# Altium PCB oldx_fc.PcbDoc (part 1 of 2)
Units mil, origin at the board's own origin, x right, y up, seen from the top; angles counter-clockwise.
Board outline 3255.08 x 2310.05 mil, 4 copper layers (Top Layer, Mid-Layer 1, Mid-Layer 2, Bottom Layer); 154 components, 132 nets, 622 pads, 230 vias.
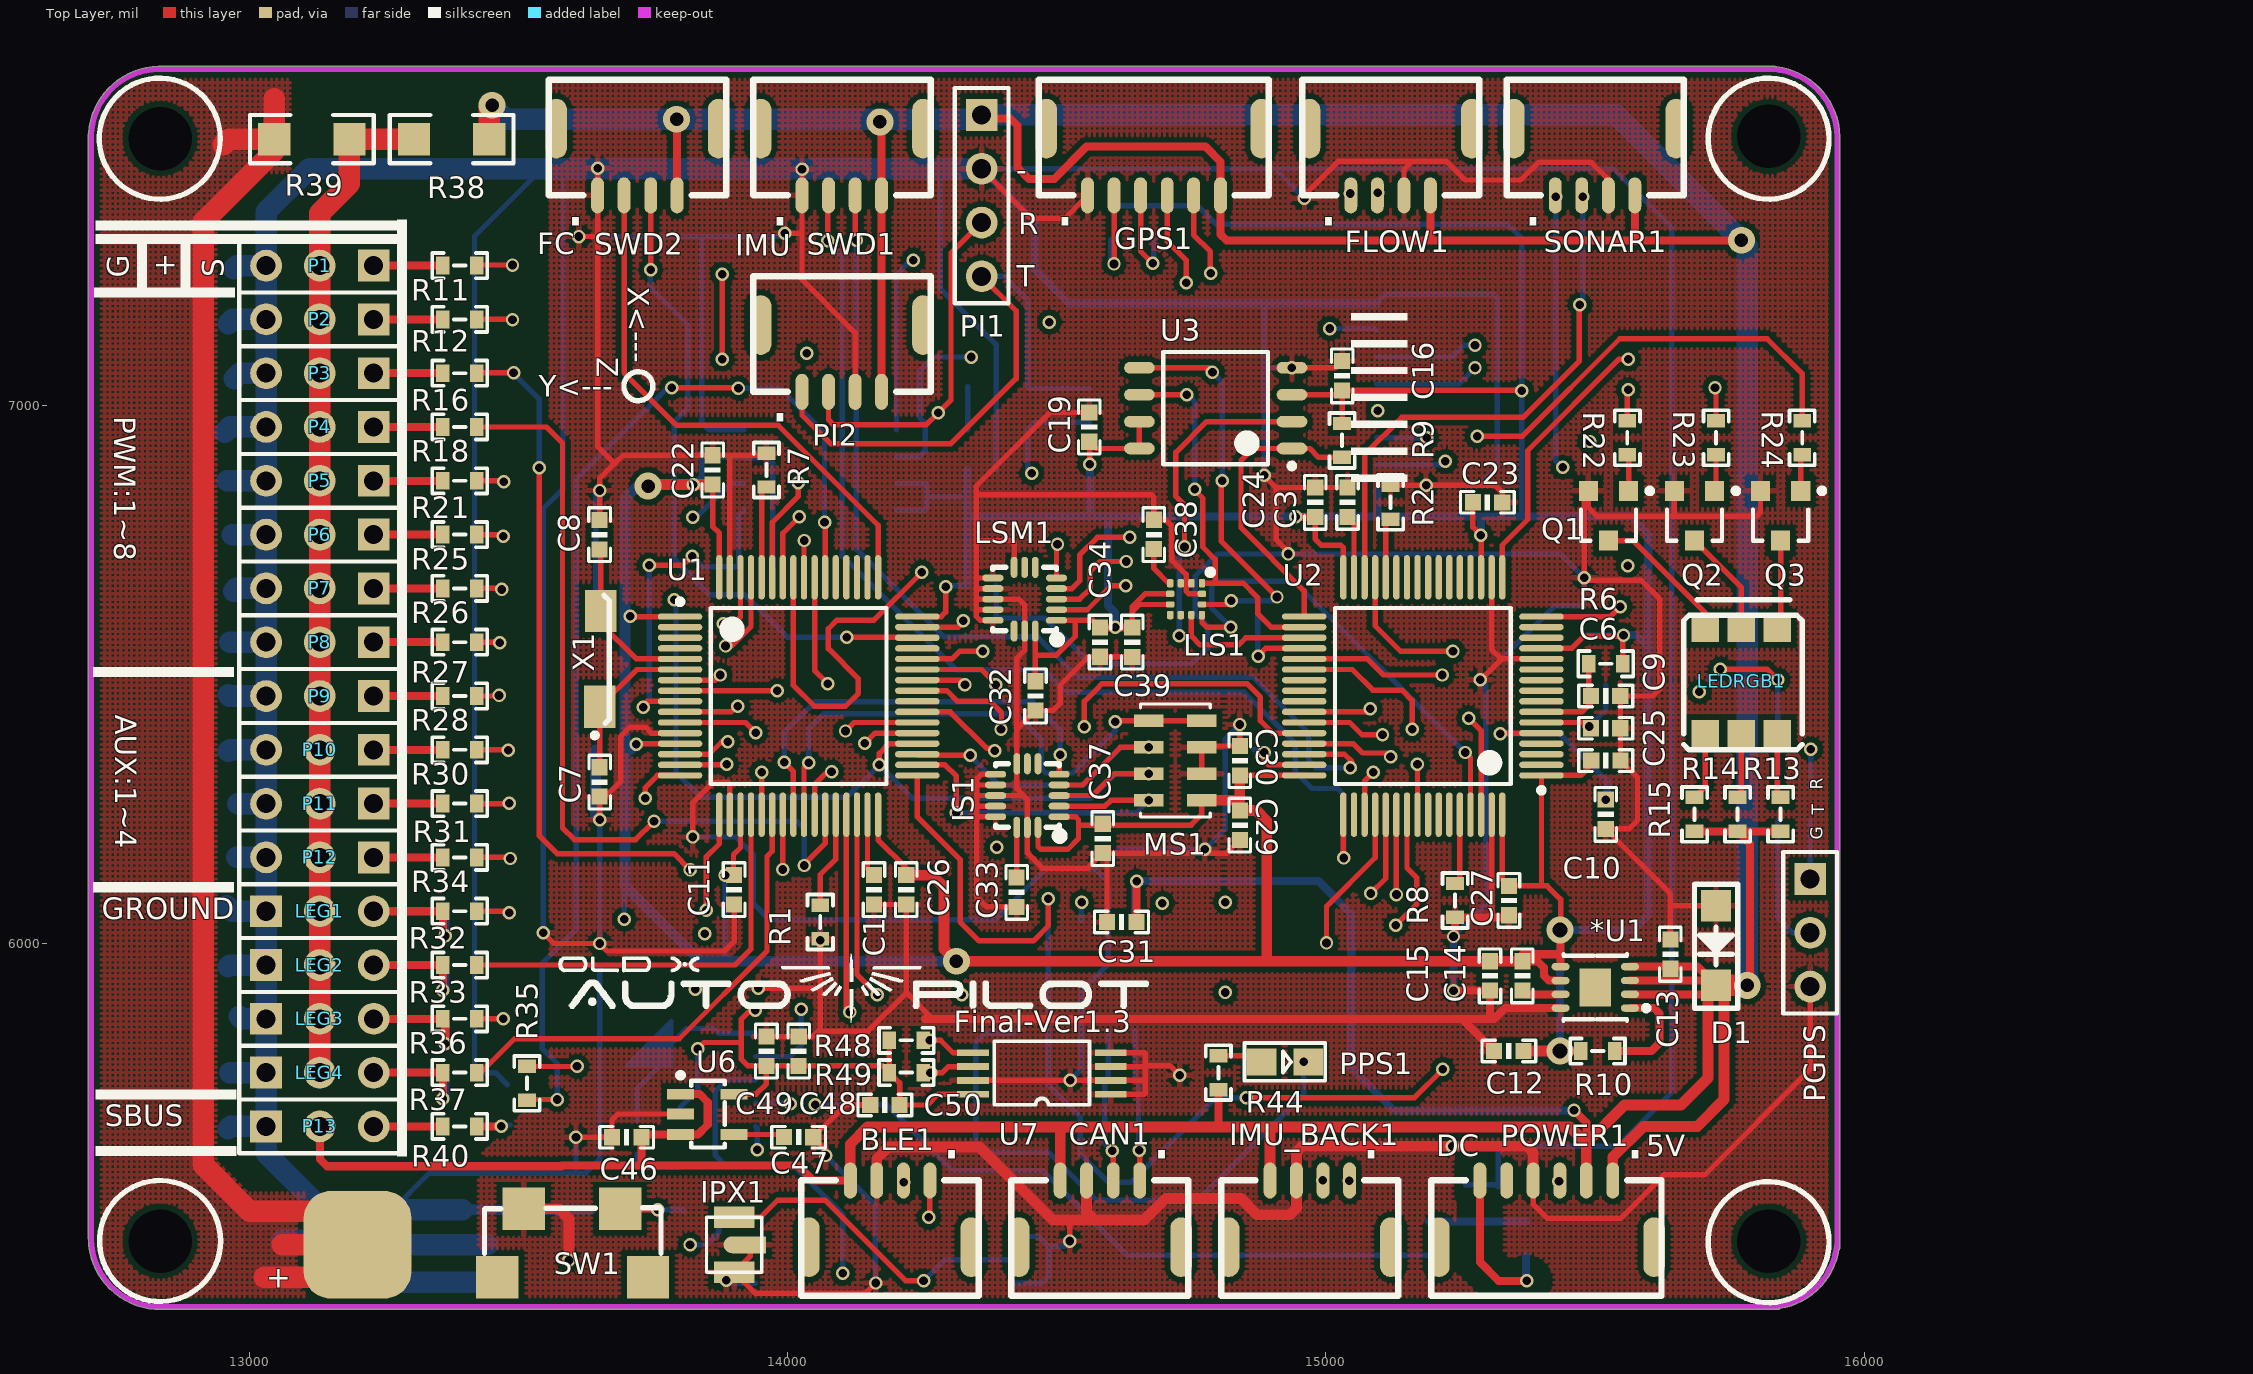
[diagram p0: Top Layer view]
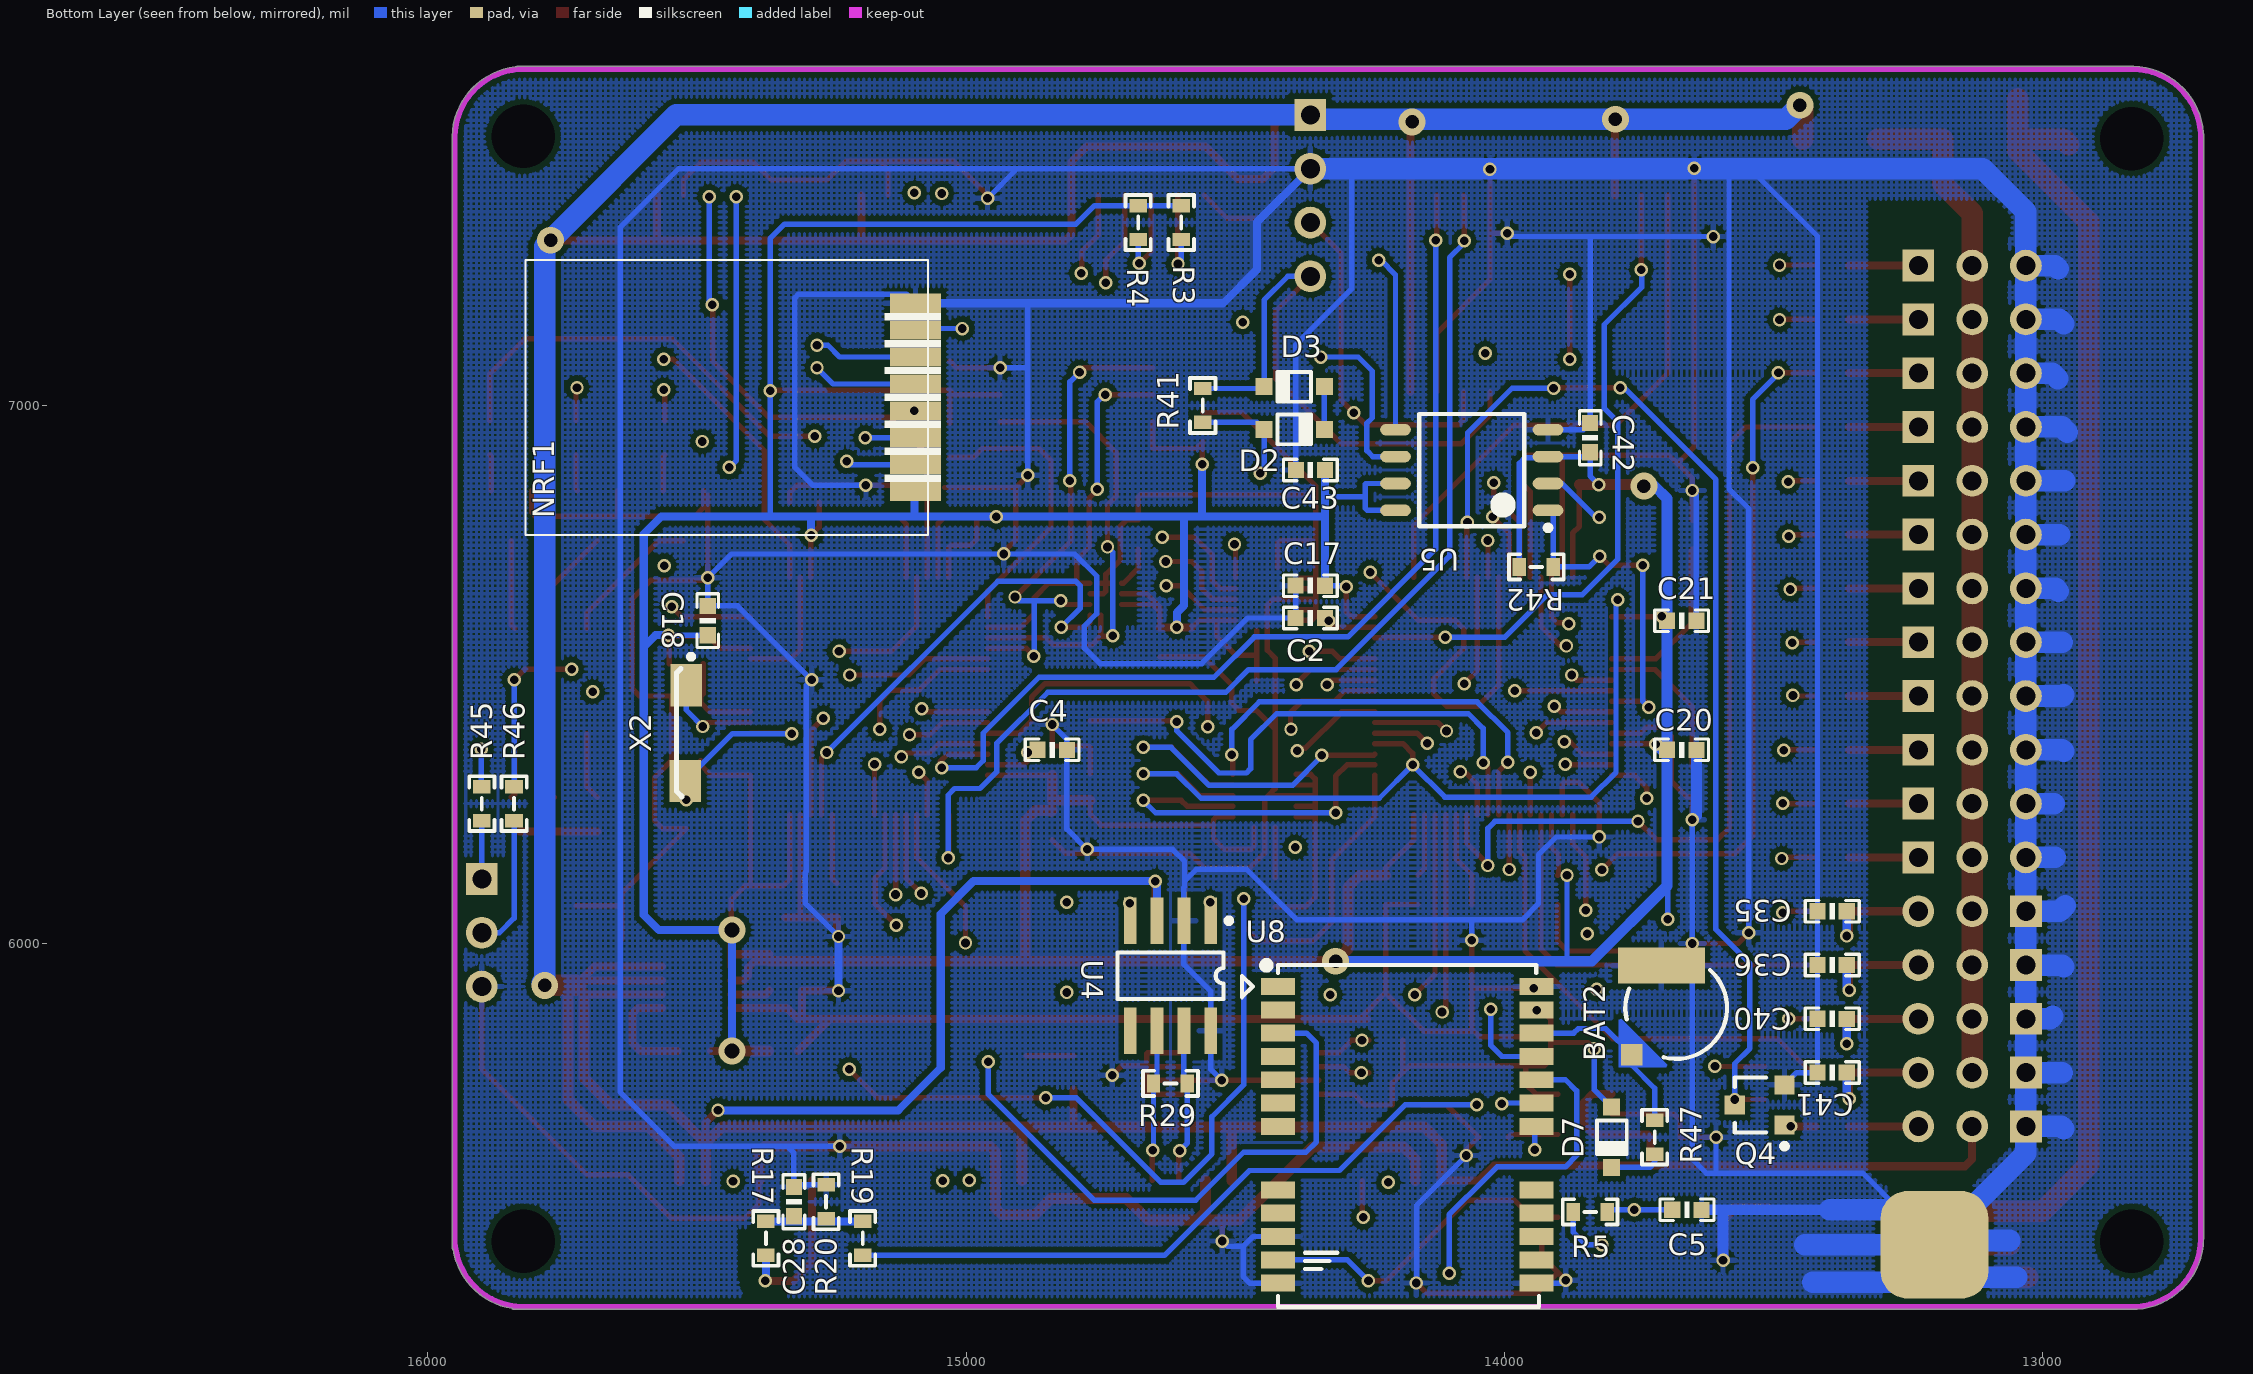
[diagram p1: Bottom Layer view, seen from below]
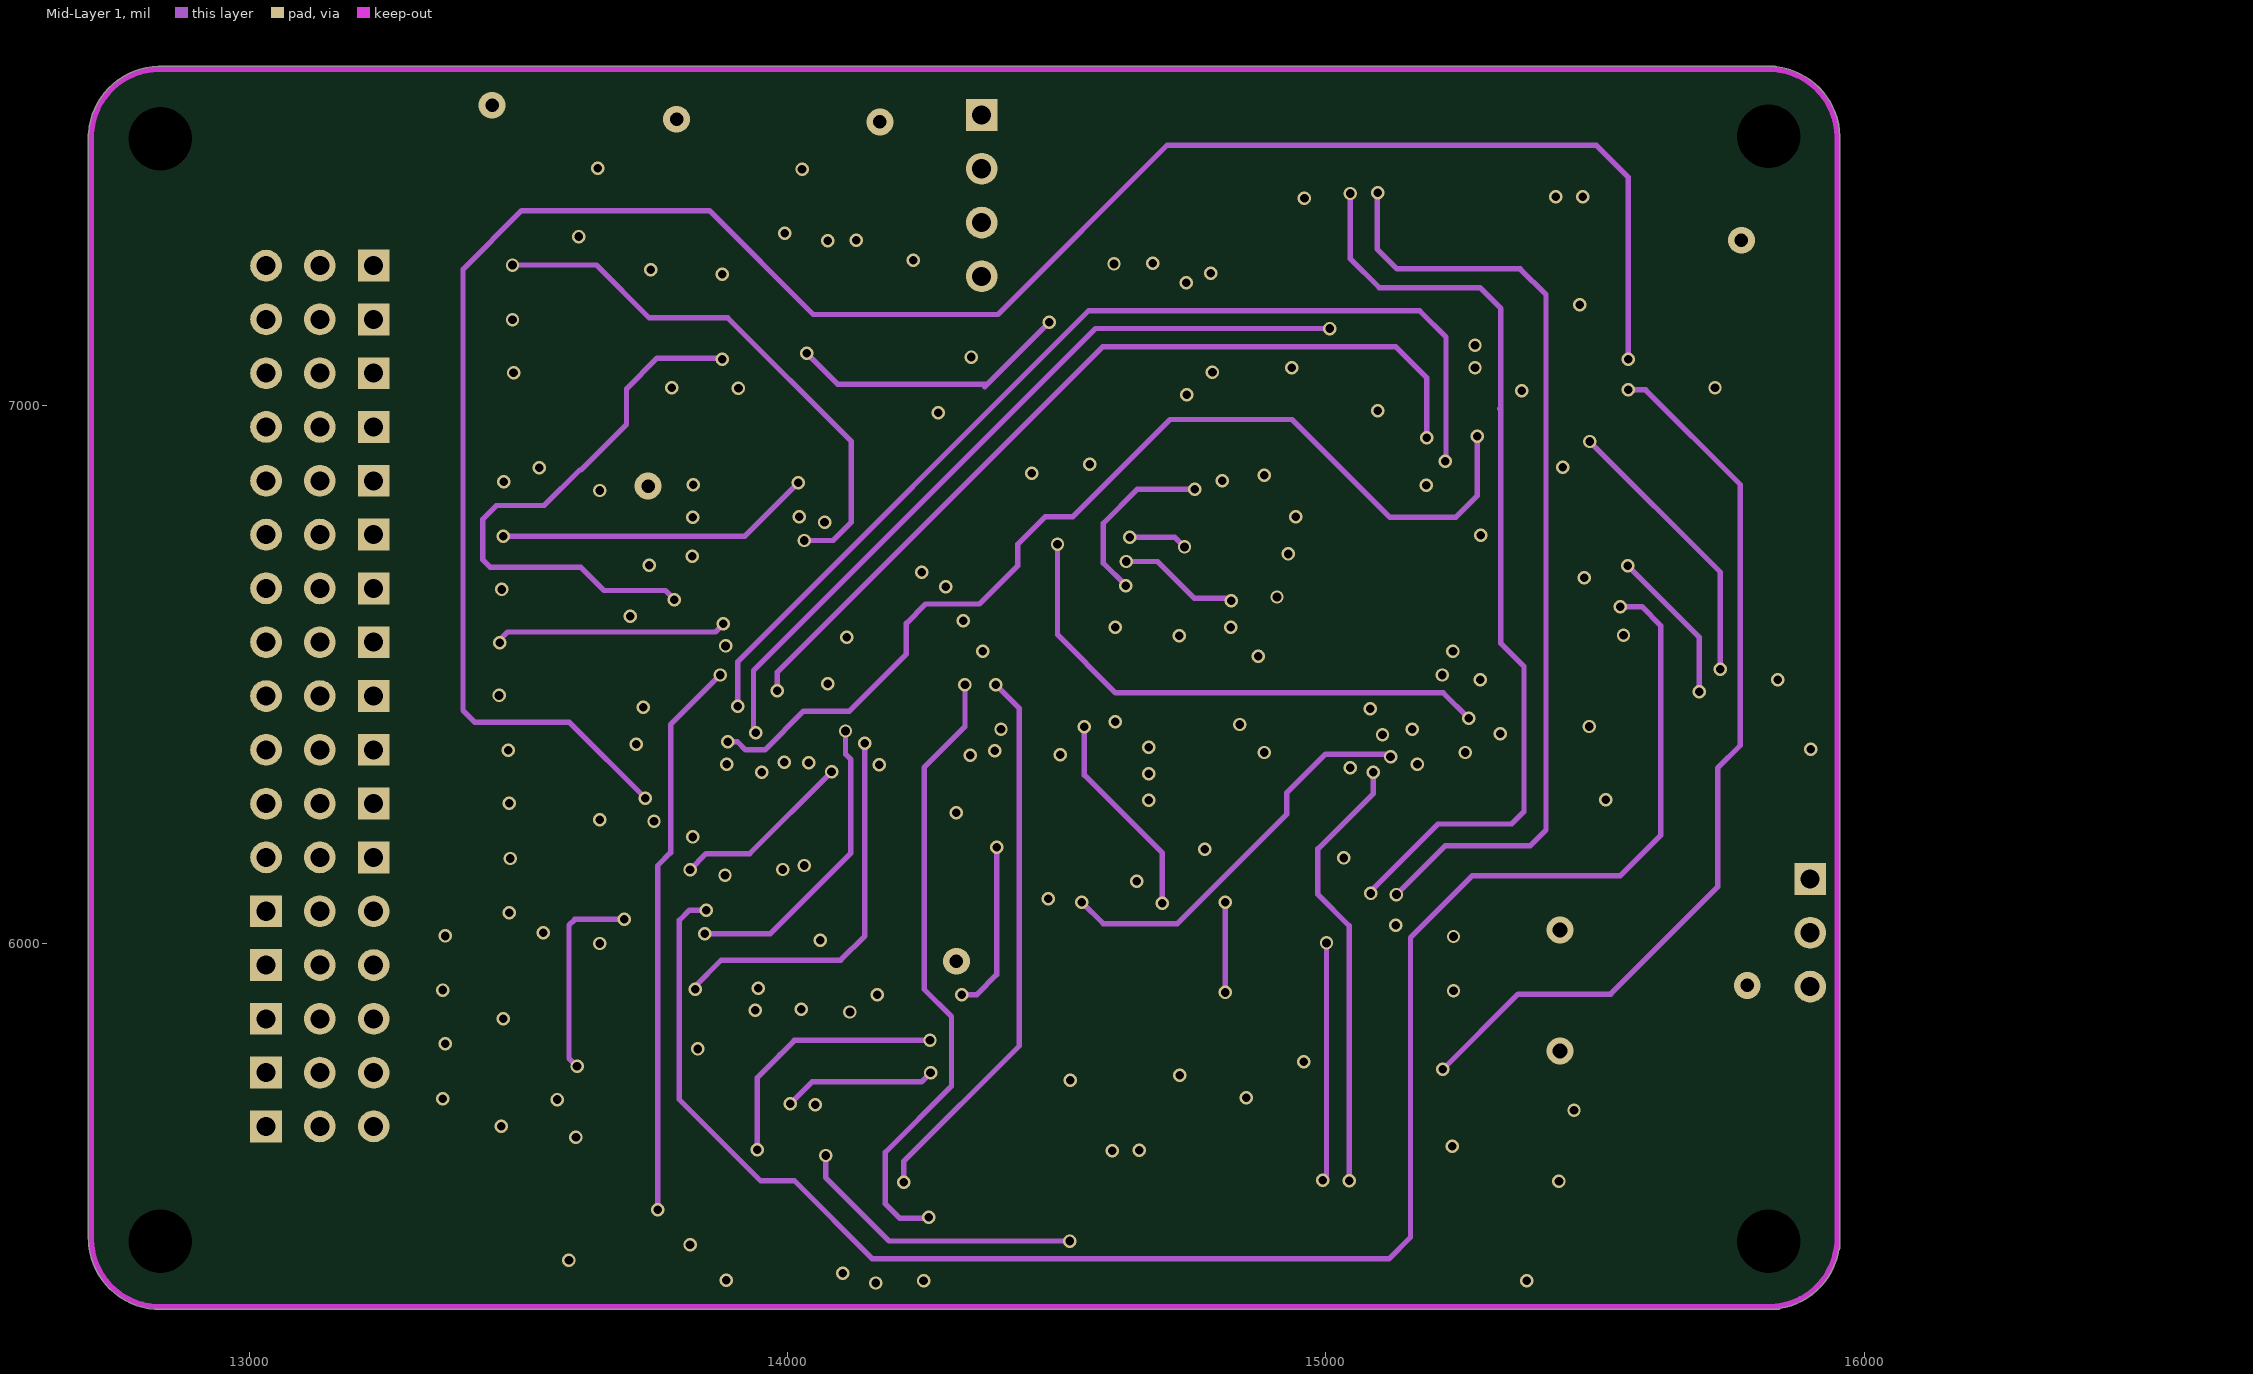
[diagram p2: Mid-Layer 1]
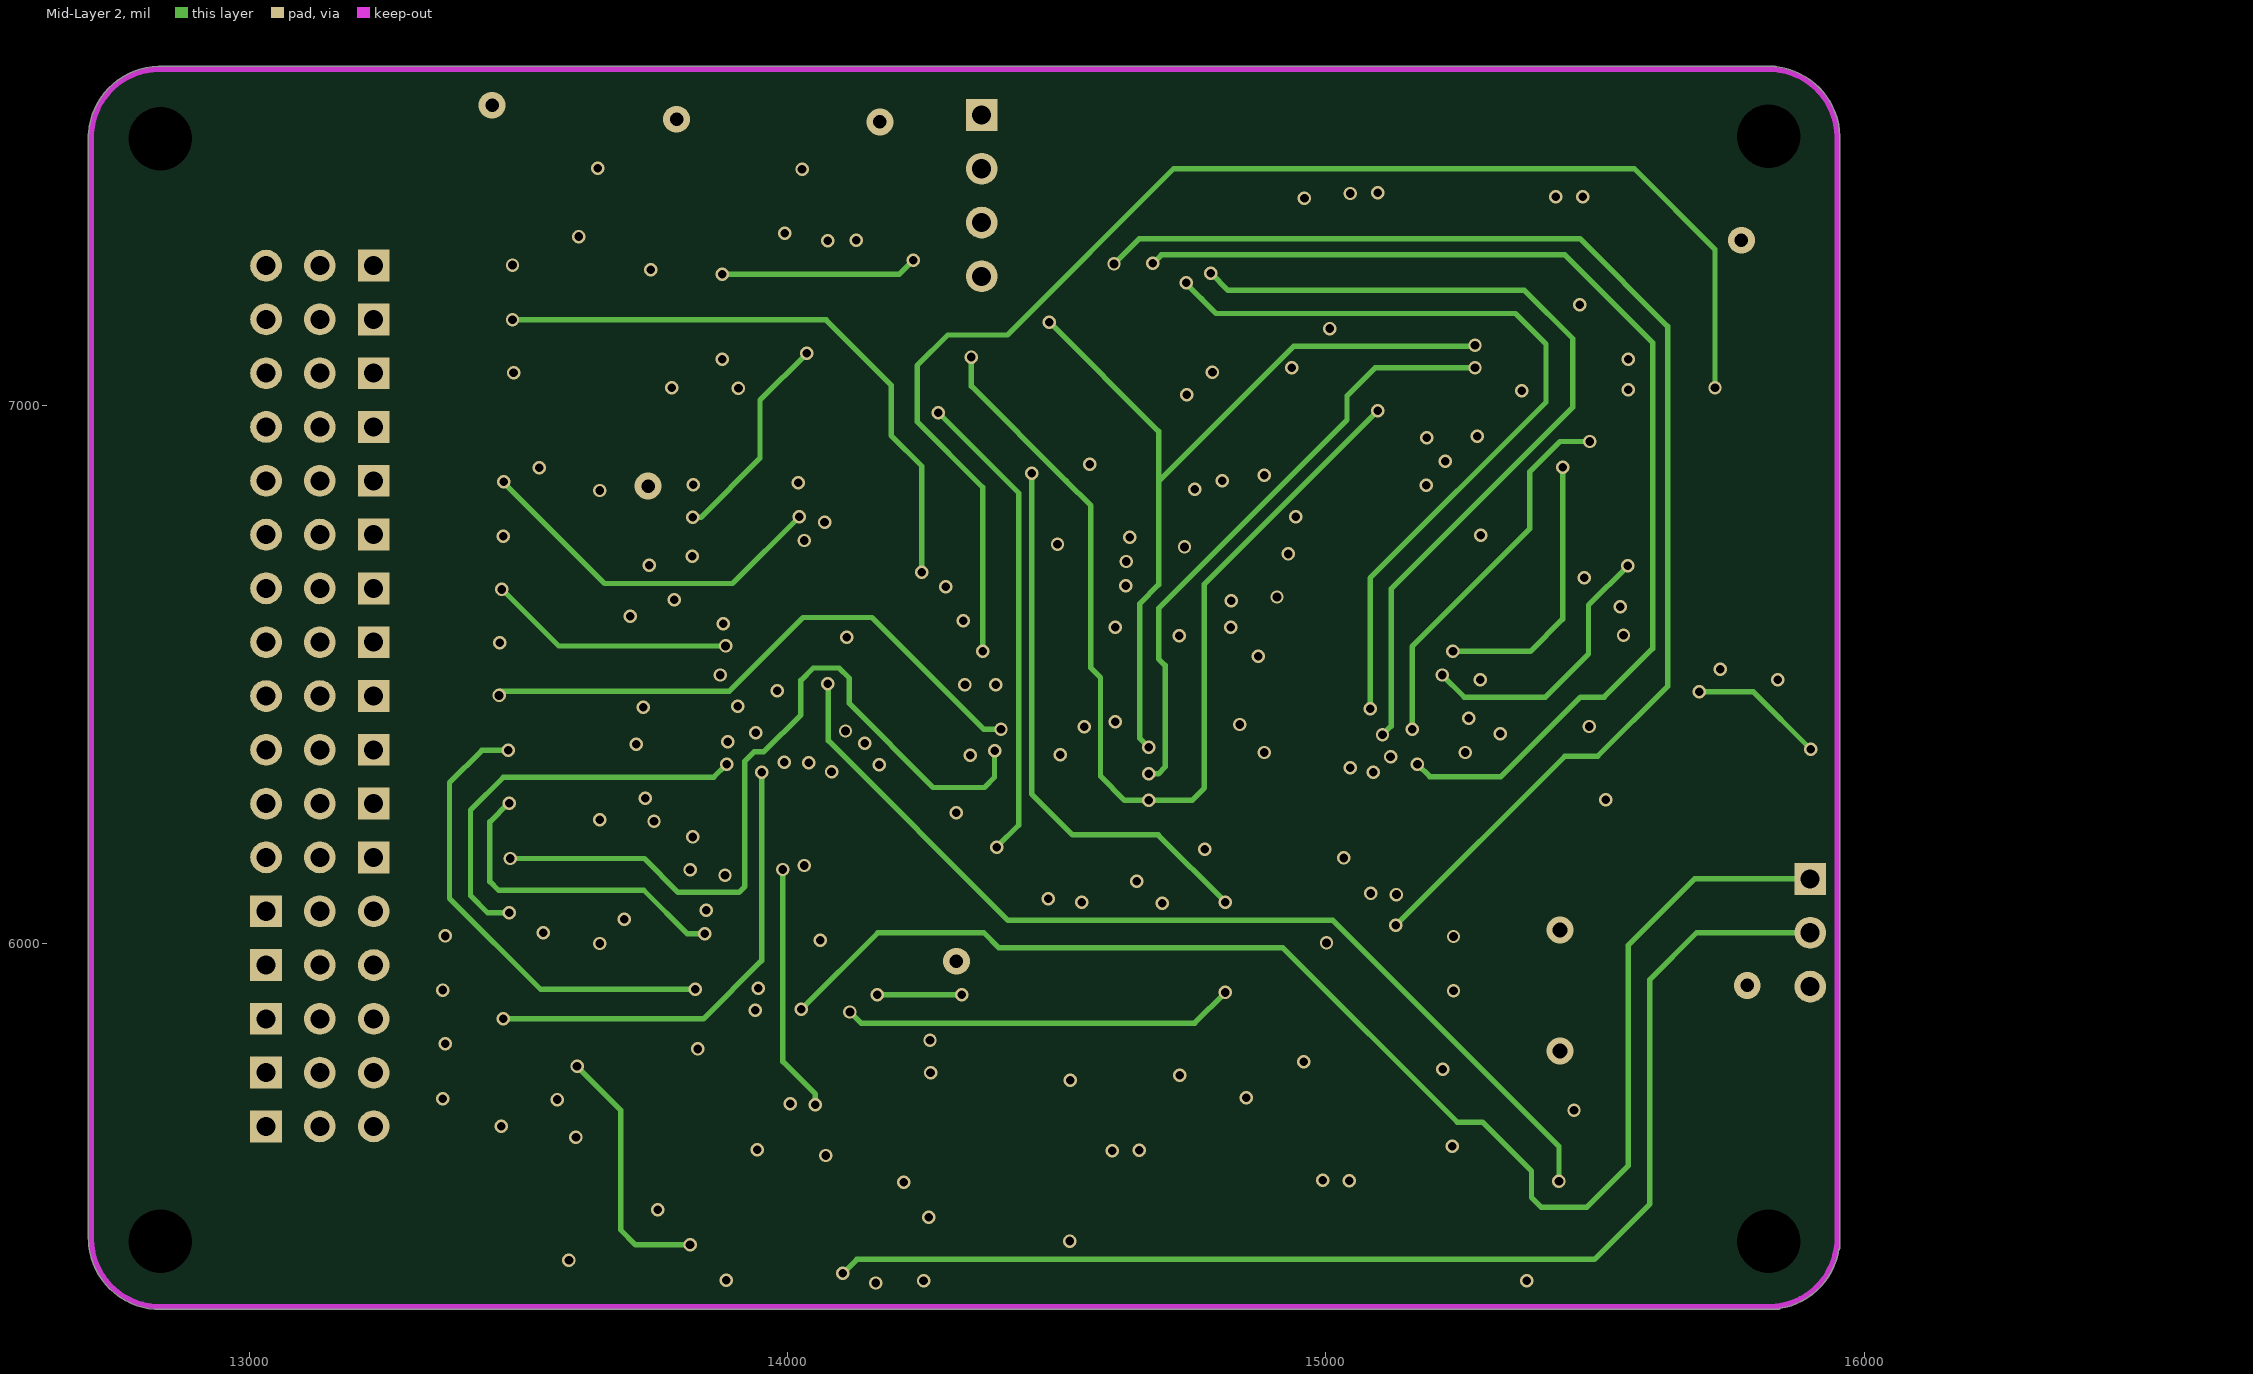
[diagram p3: Mid-Layer 2]

## Layer stack, top to bottom
Top Layer: signal copper 1.4
Dielectric: core 12.6, FR-4, Dk 4.8
Mid-Layer 1: signal copper 1.4
Dielectric: prepreg 12.6, FR-4, Dk 4.8
Mid-Layer 2: signal copper 1.4
Dielectric: core 12.6, FR-4, Dk 4.8
Bottom Layer: signal copper 1.4

## Board outline
12699.99,5449.9 cw(c12705,5450) 12699.99,5450 12699.99,7494.95 cw(c12832.5,7497.5) 12699.99,7500.05 12699.99,7505 cw(c12705,7505) 12700.28,7506.69 cw(c12832.5,7497.5) 12829.9,7630.01 cw(c12830,7625) 12830,7630.02 15819.95,7630.02 cw(c15822.5,7497.5) 15825.05,7630.02 15835,7630.02 cw(c15835,7625) 15837.81,7629.15 cw(c15822.5,7497.5) 15955.01,7500.1 cw(c15950,7500) 15955.01,7500 15955.01,5455.05 ccw(c15822.5,5452.5) 15955.01,5455.1 15955.01,5455.05 cw(c15822.5,5452.5) 15955.04,5452.5 cw(c15822.5,5452.5) 15955.01,5449.95 15955.01,5435 cw(c15950,5435) 15953.32,5431.24 cw(c15822.5,5452.5) 15843.75,5321.68 cw(c15840,5325) 15840,5319.98 12835.05,5319.98 ccw(c12832.5,5452.5) 12835.1,5319.99 12835.05,5319.98 cw(c12832.5,5452.5)

## Design rules (kind name [scope] priority, off if disabled: settings)
Clearance Clearance_2 [(InPolygon) vs InNet('POWER')] p1: gap=35
Clearance Clearance_1 [(InPolygon)] p2: gap=10
Clearance [All] p3: gap=6
PolygonConnect [All] p1: connectstyle=Relief reliefconductorwidth=10 reliefentries=4 polygonreliefangle="90 Angle"
RoutingVias [All] p1: holewidth=28 width=50 viastyle="Through Hole" minholewidth=16 minwidth=25 maxholewidth=28 maxwidth=50
SilkscreenOverComponentPads [All] p1: minsilkscreentomaskgap=10
SolderMaskExpansion [All] p1: expansion=4
Width [All] p1: maxlimit=40 minlimit=10 preferedwidth=10 minimp=50.000000 maximp=50.000000 favimp=50.000000
27 further rules are at their usual default settings.

## Components (designator, comment, footprint, x,y, rotation, side; value= is the part's Value field where it differs from the comment)
*U1 "AS1364-BTDT-33" TDFN-8 15565,5880 r0 top
BAT2 "XH414" XH414 13680,5880 r0 bottom
BLE1 "Header 4" JST_GH_V4 14190,5345 r180 top
C1 "2.2UF" C0603 14160,6100 r270 top
C2 "2.2UF" C0603 14360,6605 r0 bottom
C3 "2.2UF" C0603 15040,6820 r90 top
C4 "2.2UF" C0603 14840,6360 r180 bottom
C5 "10NF" C0603 13660,5505 r0 bottom
C6 "10NF" C0603 15520,6460 r180 top
C7 "20PF" C0603 13650,6300 r90 top
C8 "20PF" C0603 13650,6760 r270 top
C9 "20PF" C0603 15520,6400 r180 top
C10 "20PF" C0603 15520,6240 r90 top
C11 "0.1UF" C0603 13900,6100 r270 top
C12 "0.1UF" C0603 15340,5800 r180 top
C13 "4.7uf" C0603 15640,5980 r90 top
C14 "10nf" C0603 15365,5940 r270 top
C15 "4.7uf" C0603 15305,5940 r270 top
C16 "0.1UF" C0603 15030,7055 r90 top
C17 "0.1UF" C0603 14360,6665 r0 bottom
C18 "0.1UF" C0603 15480,6600 r90 bottom
C19 "1UF" C0603 14560,6960 r270 top
C20 "0.1UF" C0603 13670,6360 r180 bottom
C21 "0.1UF" C0603 13670,6600 r180 bottom
C22 "0.1UF" C0603 13860,6880 r90 top
C23 "0.1UF" C0603 15300,6820 r0 top
C24 "0.1UF" C0603 14980,6820 r90 top
C25 "0.1UF" C0603 15520,6340 r0 top
C26 "0.1UF" C0603 14220,6100 r270 top
C27 "0.1UF" C0603 15340,6080 r270 top
C28 "100uF" C0603 15320,5520 r90 bottom
C29 "4.7uf" C0603 14840,6220 r270 top
C30 "0.1UF" C0603 14840,6340 r270 top
C31 "0.1UF" C0603 14620,6040 r0 top
C32 "0.1UF" C0603 14460,6460 r90 top
C33 "0.1UF" C0603 14425,6095 r90 top
C34 "0.1UF" C0603 14580,6560 r90 top
C35 "1uF" C0603 13390,6060 r0 bottom
C36 "1uF" C0603 13390,5960 r0 bottom
C37 "0.1UF" C0603 14585,6195 r90 top
C38 "100nF" C0603 14680,6760 r90 top
C39 "0.1UF" C0603 14640,6560 r270 top
C40 "1uF" C0603 13390,5860 r0 bottom
C41 "1uF" C0603 13390,5760 r0 bottom
C42 "0.1UF" C0603 13840,6940 r90 bottom
C43 "1UF" C0603 14360,6880 r180 bottom
C46 "1uF" C0603 13700,5640 r0 top
C47 "223" C0603 14020,5640 r180 top
C48 "104" C0603 14020,5800 r270 top
C49 "1uF" C0603 13960,5800 r270 top
C50 "0.1UF" C0603 14180,5700 r0 top
CAN1 "Header 4" JST_GH_V4 14580,5345 r180 top
D1 "IN4733 5.1V" 1n4148-SOD123 15725,6060 r270 top
D2 "BAT54WS" SOD-323 14390,6955 r0 bottom
D3 "BAT54WS" SOD-323 14390,7035 r180 bottom
D7 "BAT54WS" SOD-323 13800,5640 r90 bottom
FLOW1 "Header 4" JST_GH_V4 15120,7605 r0 top
GPS1 "Header 6" JST_GH_V6 14680,7605 r0 top
IMU_BACK1 "Header 4" JST_GH_V4 14970,5345 r180 top
IPX1 "IPEX" IPEX 13900,5440 r0 top
IS1 "ICM20602" ICM-20602 14445,6275 r180 top
LEDRGB1 "5050 RGB" 5050RGB 15705,6420 r90 top
LEG1 "Header 3H" HDR1X3 13030,6060 r0 top
LEG2 "Header 3H" HDR1X3 13030,5960 r0 top
LEG3 "Header 3H" HDR1X3 13030,5860 r0 top
LEG4 "Header 3H" HDR1X3 13030,5760 r0 top
LIS1 "LIS3MDL" LIS3MDL 14740,6640 r270 top
LSM1 "LSM6DS33" LSM6DS33 14440,6640 r180 top
MS1 "MS5611" MS5611 14720,6340 r180 top
NRF1 "Header 8" NRF 15120,6840 r0 bottom
P1 "Header 3" HDR1X3 13230,7260 r180 top
P2 "Header 3" HDR1X3 13230,7160 r180 top
P3 "Header 3" HDR1X3 13230,7060 r180 top
P4 "Header 3" HDR1X3 13230,6960 r180 top
P5 "Header 3" HDR1X3 13230,6860 r180 top
P6 "Header 3" HDR1X3 13230,6760 r180 top
P7 "Header 3" HDR1X3 13230,6660 r180 top
P8 "Header 3" HDR1X3 13230,6560 r180 top
P9 "Header 3" HDR1X3 13230,6460 r180 top
P10 "Header 3" HDR1X3 13230,6360 r180 top
P11 "Header 3" HDR1X3 13230,6260 r180 top
P12 "Header 3" HDR1X3 13230,6160 r180 top
P13 "Header 3" HDR1X3 13030,5660 r0 top
PGPS "Header 3" HDR1X3 15900,6120 r270 top
PI1 "Header 4" HDR1X4 14360,7540 r270 top
PI2 "Header 4" JST_GH_V4 14100,7240 r0 top
POWER1 "Header 6" JST_GH_V6 15410,5345 r180 top
PPS1 "LED" SMDLED 14880,5780 r0 top
Q1 "S8050" SOT-23R 15525,6800 r180 top
Q2 "S8050" SOT-23R 15685,6800 r180 top
Q3 "S8050" SOT-23R 15845,6800 r180 top
Q4 "S8050" SOT-23R 13520,5700 r90 bottom
R1 "10K" R0603 14060,6040 r90 top
R2 "10K" R0603 15120,6820 r270 top
R3 "4.7K" R0603 14600,7340 r270 bottom
R4 "4.7K" R0603 14680,7340 r270 bottom
R5 "10K" R0603 13840,5501.06 r0 bottom
R6 "10K" R0603 15520,6520 r0 top
R7 "10K" R0603 13960,6880 r270 top
R8 "10K" R0603 15240,6080 r90 top
R9 "10K" R0603 15030,6935 r270 top
R10 "1K" R0603 15505,5800 r0 top
R11 "1K" R0603 13390,7260 r180 top
R12 "1K" R0603 13390,7160 r180 top
R13 "100R" R0603 15845,6240 r90 top
R14 "100R" R0603 15765,6240 r90 top
R15 "100R" R0603 15685,6240 r90 top
R16 "1K" R0603 13390,7060 r180 top
R17 "10K" R0603 15372,5452 r270 bottom
R18 "1K" R0603 13390,6960 r180 top
R19 "1K" R0603 15192,5452 r90 bottom
R20 "1K" R0603 15260,5520 r270 bottom
R21 "1K" R0603 13390,6860 r180 top
R22 "1K" R0603 15560,6940 r270 top
R23 "1K" R0603 15725,6940 r270 top
R24 "1K" R0603 15885,6940 r270 top
R25 "1K" R0603 13390,6760 r180 top
R26 "1K" R0603 13390,6660 r180 top
R27 "1K" R0603 13390,6560 r180 top
R28 "1K" R0603 13390,6460 r180 top
R29 "120R" R0603 14620,5740 r180 bottom
R30 "1K" R0603 13390,6360 r180 top
R31 "1K" R0603 13390,6260 r180 top
R32 "1K" R0603 13390,6060 r0 top
R33 "1K" R0603 13390,5960 r0 top
R34 "1K" R0603 13390,6160 r180 top
R35 "10K" R0603 13515,5740 r90 top
R36 "1K" R0603 13390,5860 r0 top
R37 "1K" R0603 13390,5760 r0 top
R38 "1K" R1206 13375,7495 r180 top
R39 "1K" R1206 13115,7495 r0 top
R40 "1K" R0603 13390,5660 r180 top
R41 "1K" R0603 14560,7000 r270 bottom
R42 "10K" R0603 13940,6700 r180 bottom
R44 "510R" R0603 14800,5760 r90 top
R45 "120R" R0603 15900,6260 r90 bottom
R46 "120R" R0603 15840,6260 r90 bottom
R47 "120R" R0603 13720,5640 r270 bottom
R48 "4.7K" R0603 14220,5820 r180 top
R49 "4.7K" R0603 14220,5760 r180 top
SONAR1 "Header 4" JST_GH_V4 15500,7605 r0 top
SW1 "SW-PB1" KEY_SAD 13460,5380 r0 top
SWD1 "Header 4" JST_GH_V4 14100,7605 r0 top
SWD2 "Header 4" JST_GH_V4 13720,7605 r0 top
U1 "STM32F405RGT6" LQFP64_M 14020,6460 r0 top
U2 "STM32F405RGT6" LQFP64_M 15180,6460 r180 top
U3 "W25X16" W25Q32FVZPIG 14795,6995 r180 top
U4 "TJA1050" SO8 14620,5940 r180 bottom
U5 "W25X16" W25Q32FVZPIG 14060,6880 r0 bottom
U6 "RT9193-33" SOT-23-5 13800,5720 r180 top
U7 "24C32" TSSOP8 14600,5720 r180 top
U8 "GPS_NEO-8" GPS_NEO-6 14420,5920 r180 bottom
X1 "8MHZ" PXCL 13650,6440 r0 top
X2 "8MHZ" PXCL 15520,6480 r0 bottom

## Footprints (in the part's own frame and the unit in brackets; to place one, negate y for a bottom-side part, rotate by r counter-clockwise, add the part's x,y. Pads: shape width x height; smd on the part's side, far side on the other; paste and mask are expansions set on the pad)
1n4148-SOD123 [mm]
  rect 1.5x1.4 smd: 1(-0.254,0) 2(3.494,0)
  silkscreen extent -1.27,-1.02 4.57,1.02, body extent -0.25,-0.85 3.6,0.85, height 1.42
5050RGB [mm]
  rect 1.3x1.3 smd: 1(-0.762,0) 2(-0.762,-1.7) 3(-0.762,-3.4) 4(4.208,-3.4) 5(4.208,-1.7) 6(4.208,0)
  silkscreen extent -1.52,-4.57 5.56,1.02
C0603 [mil]
  rect 30x30 smd: 1(-27,0) 2(27.5,-0.06)
  silkscreen extent -50,-20 50,20, body extent -31,-16 31,16, height 12
GPS_NEO-6 [mm]
  rect 1.6x0.8 smd: 1(0,0) 2(0,-1.1) 3(0,-2.2) 4(0,-3.3) 5(0,-4.4) 6(0,-5.5) 7(0,-6.6) 8(0,-9.6) 9(0,-10.7) 10(0,-11.8) 11(0,-12.9) 12(0,-14) 13(12.2,-14) 14(12.2,-12.9) 15(12.2,-11.8) 16(12.2,-10.7) 17(12.2,-9.6) 18(12.2,-6.6) 19(12.2,-5.5) 20(12.2,-4.4) 21(12.2,-3.3) 22(12.2,-2.2) 23(12.2,-1.1) 24(12.2,0)
  silkscreen extent -1.7,-15.11 12.32,1.15
HDR1X3 [mm] "Connector; Header; 3 Position"
  rect 1.5x1.5 hole 0.9: 1(0,0)
  round 1.5 hole 0.9: 2(2.54,0) 3(5.08,0)
  silkscreen extent -1.27,-1.27 6.35,1.27
HDR1X4 [mm] "Connector; Header; 4 Position"
  rect 1.5x1.5 hole 0.9: 1(0,0)
  round 1.5 hole 0.9: 2(2.54,0) 3(5.08,0) 4(7.62,0)
  silkscreen extent -1.27,-1.27 8.89,1.27
ICM-20602 [mm]
  oval 1x0.32 smd: 1(-1.5,1) 2(-1.5,0.5) 3(-1.5,0) 4(-1.5,-0.5) 5(-1.5,-1) 9(1.5,-1) 10(1.5,-0.5) 11(1.5,0) 12(1.5,0.5) 13(1.5,1)
  oval 0.32x1 smd: 6(-0.5,-1.5) 7(0,-1.5) 8(0.5,-1.5) 14(0.5,1.5) 15(0,1.5) 16(-0.5,1.5)
  silkscreen extent -1.65,-1.5 1.5,2.03, body extent -1.5,-1.5 1.5,1.5, height 0.75
IPEX [mm]
  oval 1x0.8 smd: 1(0,0)
  rect 1.5x0.8 smd: 1(0.762,0)
  rect 1.9x1 smd: 2(0,1.3) 3(0,-1.3)
  silkscreen extent -1.3,-1.3 1.3,1.3
JST_GH_V4 [mil]
  rrect100% 24x67 smd: 1(-73.82,-214.57) 2(-24.61,-214.57) 3(25,-214.57) 4(74,-214.57)
  rrect100% 40x111 smd: GND(-150.59,-90.55) GND(151,-90.55)
  silkscreen extent -164,-215 165,0, body extent -162,-235 163,-40, height 165
JST_GH_V6 [mil]
  rrect100% 24x67 smd: 1(-123.03,-214.57) 2(-73.82,-214.57) 3(-24.61,-214.57) 4(25,-214.57) 5(74,-214.57) 6(124,-214.57)
  rrect100% 40x111 smd: GND(-199.8,-90.55) GND(200,-90.55)
  silkscreen extent -214,-215 214,0, body extent -212,-232 212,-37, height 165
KEY_SAD [mm]
  rect 2x2 smd: 1(1.245,3.226) 2(5.791,3.226) ""(0,0) ""(7.112,0)
  silkscreen extent -0.61,1.12 7.72,3.28
LIS3MDL [mm]
  rrect50% 0.4x0.3 smd: 1(-0.75,0.75) 2(-0.75,0.25) 3(-0.75,-0.25) 4(-0.75,-0.75) 7(0.75,-0.75) 8(0.75,-0.25) 9(0.75,0.25) 10(0.75,0.75)
  rrect50% 0.3x0.4 smd: 5(-0.25,-0.75) 6(0.25,-0.75) 11(0.25,0.75) 12(-0.25,0.75)
  silkscreen extent -1.29,1.12 -1.25,1.16
LQFP64_M [mm] "Thin QFP, 64-Leads, Body 10x10mm, Pitch 0.5mm, IPC Low Density"
  oval 2.1x0.3 smd: 1(-5.6,3.75) 2(-5.6,3.25) 3(-5.6,2.75) 4(-5.6,2.25) 5(-5.6,1.75) 6(-5.6,1.25) 7(-5.6,0.75) 8(-5.6,0.25) 9(-5.6,-0.25) 10(-5.6,-0.75) 11(-5.6,-1.25) 12(-5.6,-1.75) 13(-5.6,-2.25) 14(-5.6,-2.75) 15(-5.6,-3.25) 16(-5.6,-3.75) 33(5.6,-3.75) 34(5.6,-3.25) 35(5.6,-2.75) 36(5.6,-2.25) 37(5.6,-1.75) 38(5.6,-1.25) 39(5.6,-0.75) 40(5.6,-0.25) 41(5.6,0.25) 42(5.6,0.75) 43(5.6,1.25) 44(5.6,1.75) 45(5.6,2.25) 46(5.6,2.75) 47(5.6,3.25) 48(5.6,3.75)
  oval 0.3x2.1 smd: 17(-3.75,-5.6) 18(-3.25,-5.6) 19(-2.75,-5.6) 20(-2.25,-5.6) 21(-1.75,-5.6) 22(-1.25,-5.6) 23(-0.75,-5.6) 24(-0.25,-5.6) 25(0.25,-5.6) 26(0.75,-5.6) 27(1.25,-5.6) 28(1.75,-5.6) 29(2.25,-5.6) 30(2.75,-5.6) 31(3.25,-5.6) 32(3.75,-5.6) 49(3.75,5.6) 50(3.25,5.6) 51(2.75,5.6) 52(2.25,5.6) 53(1.75,5.6) 54(1.25,5.6) 55(0.75,5.6) 56(0.25,5.6) 57(-0.25,5.6) 58(-0.75,5.6) 59(-1.25,5.6) 60(-1.75,5.6) 61(-2.25,5.6) 62(-2.75,5.6) 63(-3.25,5.6) 64(-3.75,5.6)
  silkscreen extent -5.72,-4.15 4.15,4.57, body extent -5,-5 5,5, height 1.6
LSM6DS33 [mm]
  oval 1x0.32 smd: 1(-1.5,1) 2(-1.5,0.5) 3(-1.5,0) 4(-1.5,-0.5) 5(-1.5,-1) 9(1.5,-1) 10(1.5,-0.5) 11(1.5,0) 12(1.5,0.5) 13(1.5,1)
  oval 0.32x1 smd: 6(-0.5,-1.5) 7(0,-1.5) 8(0.5,-1.5) 14(0.5,1.5) 15(0,1.5) 16(-0.5,1.5)
  silkscreen extent -1.65,-1.5 1.5,2.03, body extent -1.5,-1.5 1.5,1.5, height 0.75
MS5611 [mm] "QFN, 8-Leads, Body 5.00x3.00mm, Pitch 1.25mm/0.00mm, Thermal Pad 4.35x0.00mm, IPC Medium Density"
  rect 1.4x0.6 smd: 1(-1.25,1.875) 2(-1.25,0.625) 3(-1.25,-0.625) 4(-1.25,-1.875) 5(1.25,-1.875) 6(1.25,-0.625) 7(1.25,0.625) 8(1.25,1.875)
  silkscreen extent -1.65,-2.67 1.65,2.67, body extent -1.6,-2.5 1.6,2.5, height 1
NRF [mm]
  round 0 all layers, no hole: 0(17.75,-9.44) 0(17.75,0.56)
  rect 2.4x0.9 smd: 1(-0.66,0) 2(-0.66,-1.27) 3(-0.66,-2.54) 4(-0.66,-3.81) 5(-0.66,-5.08) 6(-0.66,-6.35) 7(-0.66,-7.62) 8(-0.66,-8.89)
  silkscreen extent -1.87,-10.94 17.75,2.06
PXCL [mm]
  rect 1.5x2 smd: 1(0,0) 2(0.051,4.521)
  silkscreen extent -0.34,-1.45 0.46,5.26
R0603 [mil] "ÌùÆ"
  rect 25x33 smd: 1(-31.5,0) 2(31.5,0)
  silkscreen extent -51,-24 51,24, body extent -32,-16 32,16, height 20
R1206 [mil] "贴片元件"
  rect 60x60 smd: 1(-70,0) 2(70,0)
  silkscreen extent -115,-45 115,45, body extent -75,-35 75,35, height 39
SMDLED [mm]
  rect 1.4x1.27 smd: 1(0.001,-0.002) 2(2.211,-0.002)
  silkscreen extent -0.8,-0.89 3.01,0.89
SO8 [mm] "Small Outline; 8 Leads; Body Width 3.9 mm; Pitch 1.27 mm"
  rect 0.6x2.2 smd: 1(1.905,2.6) 2(0.635,2.6) 3(-0.635,2.6) 4(-1.905,2.6) 5(-1.905,-2.6) 6(-0.635,-2.6) 7(0.635,-2.6) 8(1.905,-2.6)
  silkscreen extent -2.5,-1.1 2.88,2.72
SOD-323 [mm]
  rect 0.8x0.8 smd: 1(1.422,0) 2(-1.422,0)
  silkscreen extent -0.79,-0.74 0.79,0.69
SOT-23-5 [mil]
  rect 50x20 smd: 1(0,0) 2(0,37) 3(0,75) 4(-100,75) 5(-100,0)
  silkscreen extent -83,-35 0,99, body extent -109,-24 9,94, height 59
SOT-23R [mm]
  rect 0.9x0.95 smd: 1(0.95,-1.048) 2(-0.95,-1.048) 3(0,1.302)
  silkscreen extent -2.07,-1.17 1.3,1.3
TDFN-8 [mm] "QFN, 8-Leads, Body 3.0x3.0mm (max), Pitch 0.65mm, IPC Medium Density"
  oval 0.85x0.35 smd: 1(0,0) 2(0,0.65) 3(0,1.3) 4(0,1.956) 5(-3.277,1.956) 6(-3.277,1.295) 7(-3.277,0.65) 8(-3.277,0.001)
  rect 1.5x1.8 smd: 9(-1.636,0.975)
  silkscreen extent -3.14,-0.6 0.89,2.55, body extent -3.14,-0.52 -0.14,2.48, height 0.8
TSSOP8 [mm]
  rect 1.5x0.32 smd: 1(0,0) 2(0,-0.65) 3(0,-1.3) 4(0,-1.95) 5(6.5,-1.95) 6(6.5,-1.3) 7(6.5,-0.65) 8(6.5,0)
  silkscreen extent 1,-2.5 5.5,0.5
W25Q32FVZPIG [mm] "SOP, 8-Leads, Body 5.3x5.3mm (max), Pitch 1.27mm, IPC Medium Density"
  oval 1.45x0.55 smd: 1(-3.6,1.905) 2(-3.6,0.635) 3(-3.6,-0.635) 4(-3.6,-1.905) 5(3.6,-1.905) 6(3.6,-0.635) 7(3.6,0.635) 8(3.6,1.905)
  silkscreen extent -3.73,-2.65 2.47,2.85, body extent -2.64,-2.64 2.64,2.64, height 2.65
XH414 [mm]
  rect 1x1 smd: 1(2.1,2.2)
  rect 4.1x1.7 smd: 2(0.7,-2)
  Top Layer region: 2.724,0.553 2.606,0.504 0.428,2.683 0.476,2.8 2.724,2.8
  silkscreen extent -2.4,-1.79 2.4,2.4

## Part data
*U1: library part AS1364-3.3V
BAT2: "XH414 IV01E"
BLE1 CAN1 FLOW1 IMU_BACK1 PI1 PI2 SONAR1 SWD1 SWD2: "Header, 4-Pin"
C1 C2 C3 C4: library part CAP1, "胆电容"
C5 C6 C11 C12 C13 C14 C15 C16 C17 C18 C19 C20 C21 C22 C23 C24 C25 C26 C27 C28 C29 C30 C31 C32 C33 C34 C35 C36 C37 C38 C39 C40 C41 C42 C43 C50: library part CAP, "Capacitor"
C7 C8 C9 C10: library part C2, "0805"
C46 C47 C48 C49: library part C
D1: library part ZENER3, "Zener Diode"
D2 D3 D7: library part BAT54, "单肖特基二极管"
GPS1 POWER1: "Header, 6-Pin"
IPX1: "IPEX座"
LEDRGB1: library part RGB
LEG1 LEG2 LEG3 LEG4: "Header, 3-Pin, Right Angle"
MS1: "Sensor"
NRF1: "Header, 8-Pin"
P1 P2 P3 P4 P5 P6 P7 P8 P9 P10 P11 P12 P13 PGPS: "Header, 3-Pin"
Q1 Q2 Q3 Q4: library part NPN, "8050/BCW846/BCW847"
R1 R2 R3 R4 R5 R6 R7 R8 R9 R11 R12 R13 R14 R15 R16 R17 R18 R19 R20 R21 R22 R23 R24 R25 R26 R27 R28 R29 R30 R31 R34 R35 R40 R42 R48 R49: library part Res2, "0603"
R10 R32 R33 R36 R37 R38 R39 R41: library part Res1, "Resistor"
R44 R45 R46 R47: library part R
SW1: library part S, "按键"
U3 U5: "W25X16;SST25VF016;MX25L1605"
U4: library part SN65HVD230D
U6: "3.3V超低压差LDO"
U7: library part 24C256, "EEPROM"
U8: library part GPS_NEO-6
X1 X2: library part XTAL, "Crystal Oscillator"

## Free pads (board coordinates)
  round 78.74 hole 118.11: 0(12833,5447) 0(12833,7496) 0(15823,5447) 0(15823,7500)
  rrect50% 200x200 smd: 0(13200,5440)
  rrect50% 200x200 smd far side: 0(13200,5440)

## Via types
v1: diameter 25, hole 16, Top Layer to Bottom Layer, 221 vias
v2: diameter 50, hole 25, Top Layer to Bottom Layer, 7 vias
v3: diameter 50, hole 28, Top Layer to Bottom Layer, 2 vias

## Nets (pads, with @x,y where several pads share a name; then routed paths per layer and width w, separated by ;. In a path a pad name is that pad's centre, name@x,y a point inside that pad or via, vN(x,y) a via of type N, cw(c..) or ccw(c..) an arc to the next point about the centre after c; other vN are vias at no path point)
3.3V: *U1.5 *U1.6 C11.1 C12.1 C14.1 C15.1 C16.1 C17.1 C18.1 C19.2 C20.1 C21.1 C22.1 C23.1 C24.1 C25.1 C26.1 C27.1 C29.1 C30.2 C32.2 C34.2 C37.2 C39.1 C42.1 C43.2 IS1.1 IS1.16 LIS1.5 LIS1.6 LSM1.1 LSM1.16 MS1.1 NRF1.1 R3.1 R4.1 R5.2 R6.2 R9.1 R10.1 R35.2 R42.1 U1.1 U1.13 U1.19 U1.32 U1.48 U1.64 U2.1 U2.13 U2.19 U2.32 U2.48 U2.64 U3.3 U3.7 U3.8 U5.3 U5.7 U5.8 | length 13697.7
  Top Layer w10: R35.2@13515,5771.5 v1(13608,5771.5) ; v1@13707.36,6607.64 U1.1@13799.53,6607.64 ; v1@13719.42,6371.42 U1.13@13799.53,6371.42 ; C22.1@13860,6853 13860,6775 13872.36,6762.64 U1.64@13872.36,6680.47 ; C11.1@13900,6127 13898.73,6128.27 13898.73,6165 13911.73,6178 U1.19@13911.73,6239.53 ; U1.32@14167.64,6239.53 14167.64,6192.36 14220,6140 C26.1@14220,6127 ; U1.48@14240.47,6607.64 14284.64,6607.64 14293,6616 v1(14293,6663) ; LSM1.16@14459.68,6580.94 14459.68,6536 ; C32.2@14460.06,6487.5 14459.68,6487.88 14459.68,6536 ; IS1.16@14464.69,6215.94 14464.69,6180.31 14470,6175 14520,6175 14540,6195 14540,6220 ; LSM1.1@14499.06,6600.63 14534,6600.63 ; IS1.1@14504.06,6235.63 14534.37,6235.63 14540,6230 14540,6220 ; v1(14561,6891) 14561,6931.44 C19.2@14559.94,6932.5 14572.44,6920 U3.8@14653.27,6920 U3.7@14653.27,6970 ; C34.2@14580.56,6587 C34.2@14580.06,6587.5 14566.93,6600.63 14534,6600.63 ; C39.1@14640,6587 14640,6617 ; LIS1.6@14710.47,6630.16 14653.16,6630.16 14640,6617 ; LIS1.5@14710.47,6649.84 14663.84,6649.84 14640,6626 14640,6617 ; MS1.1@14769.21,6266.18 14769.21,6240.79 14750,6221.57 14750,6220 14540,6220 ; C30.2@14839.94,6312.5 14840.07,6312.36 U2.48@14959.53,6312.36 ; U3.3@14936.73,7020 15022,7020 C16.1@15030,7028 ; C24.1@14980,6793 14980,6752 14992,6740 15028,6740 15032.36,6735.64 U2.32@15032.36,6680.47 ; R9.1@15030,6966.5 C16.1@15030,7028 ; C23.1@15273,6820 15273,6774 v1(15288,6759) ; U2.19@15288.27,6680.47 v1@15288.27,6758.73 ; U2.64@15327.64,6239.53 15327.64,6119.36 C27.1@15340,6107 15411,6107 15436,6082 v3@15436,6025 ; v1@15363,7028 C16.1@15030,7028 ; 15400.47,6108.47 U2.1@15400.47,6312.36 15474,6312.36 15493,6331.36 C25.1@15493,6340 C25.1@15489,6336 ; U2.13@15400.47,6548.58 15456.58,6548.58 15479,6571 v1@15553,6571 ; R6.2@15551.5,6520 v1@15551.5,6569.5 ; 14459.68,6536 14499,6536 14534,6571 14534,6600.63
  Top Layer w15: C34.2@14580.06,6587.5 14639.5,6587.5 C39.1@14640,6587 ; v1(14944,6793) C24.1@14980,6793 ; C14.1@15365,5967 15393,5967 15405,5955 15405,5940 15414,5931 *U1.6@15436,5931 ; C14.1@15365,5980 15430,5980 ; v3(15435,5800) R10.1@15473.5,5800 ; *U1.5@15436,5957 v3@15436,6016
  Top Layer w20: v2@13743,6853 C22.1@13860,6853 ; C26.1@14220,6127 14268,6127 14290,6105 14290,5990 v2(14313,5967) 14890,5967 ; MS1.1@14769.21,6266.18 14838.75,6266.18 14839.94,6265 C30.2@14839.94,6312.5 ; C29.1@14839.94,6247.06 C29.1@14840,6247 ; C29.1@14842,6245 C29.1@14840,6247 ; C14.1@15365,5967 C15.1@15305,5967 14890,5967 ; C12.1@15367,5800 v3(15435,5800) ; C29.1@14840,6247 14871,6247 14890,6228 14890,5967
  Mid-Layer 1 w10: v1(13608,5771.5) 13593,5786.5 13593,6034 13604,6045 v1(13696,6045)
  Mid-Layer 2 w10: v1(13608,5771.5) 13689,5690.5 13689,5468 13717,5440 v1(13818,5440)
  Bottom Layer w10: v1(13696,6045) 13696,6106 ; v1(13818,5440) 13848,5440 13871.5,5463.5 R5.2@13871.5,5501.06 ; v1(13824,6853) 13840,6869 C42.1@13840,6913 13848,6905 U5.3@13918.27,6905 13920.27,6903 13961,6903 13971.5,6892.5 R42.1@13971.5,6700 ; 13883,5973 v1(13883,6127) ; U5.8@14201.73,6805 14254,6805 14258,6809 14258,6830 ; U5.7@14201.73,6855 14257,6855 ; 14258,6854 14258,6830 ; v1(14293,6663) 14295,6665 C17.1@14333,6665 ; 14334,6794 14333,6795 14333,6830 14258,6830 ; R3.1@14600,7371.5 R4.1@14680,7371.5 14761,7371.5 14795.5,7337 15337,7337 15364,7310 v1(15364,7027) 15364,6796 ; C18.1@15480,6573 v1(15553,6573)
  Bottom Layer w15: C43.2@14332.5,6879.94 14333,6879.44 14333,6795 C17.1@14333,6665 ; 14334,6794 14559,6794 ; 14561,6794 15096,6794 ; 14561,6796 v1(14561,6891) ; 14595,6793 14595,6628 14608,6615 v1(14608,6588) ; NRF1.1@15094,6840 15096,6838 15096,6794 ; v1(15288,6759) 15288,6794 ; v3(15435,5800) v3(15435,6025) 15571,6025 15599,6053 15599,6551 ; v1(15553,6573) 15577,6573 15599,6551 ; 15096,6794 15288,6794 ; 15288,6794 15566,6794 15599,6761 15599,6551
  Bottom Layer w20: C21.1@13697,6608 13697,6827 v2@13720,6850 ; v1(13707,6608) 13699,6600 C21.1@13697,6600 C20.1@13697,6360 ; v1(13718,6370) 13708,6360 C20.1@13697,6360 ; v2(14313,5967) 13837,5967 13697,6107 C20.1@13697,6360
  other v2: 13740,6850
3.3VG: C48.2 C49.2 C50.2 D7.1 R48.2 R49.2 U6.5 U7.8 U8.23 | length 985.8
  Top Layer w10: v1(13832,5804) 13844,5816 13913,5816 ; U6.5@13900,5720 13941,5720 13959.94,5738.94 C49.2@13959.94,5772.5 ; v1(13939,5876) 13930,5876 13913,5859 13913,5816 ; R48.2@14188.5,5820 R49.2@14188.5,5760 ; 14247.5,5699.94 14259,5699.94 ; U7.8@14344.09,5720 14279.06,5720 14259,5699.94 ; 13913,5816 13913,5785 13925.5,5772.5 C49.2@13959.94,5772.5 ; C49.2@13959.94,5772.5 C48.2@14019.94,5772.5 14176,5772.5 R49.2@14188.5,5760 ; R49.2@14188.5,5760 14207.5,5741 C50.2@14207.5,5699.94 14259,5699.94
  Bottom Layer w10: D7.1@13800,5696 13832,5728 v1(13832,5804)
5V: *U1.2 *U1.3 *U1.4 BLE1.4 C13.1 C31.2 C46.2 CAN1.4 D1.2 FLOW1.4 GPS1.6 IMU_BACK1.4 P13.2 PI1.1 PI2.4 POWER1.1 POWER1.2 R13.1 R14.1 R15.1 R38.1 R44.1 SONAR1.4 SWD1.4 SWD2.4 U4.3 U6.1 U6.3 | length 12859.4
  Top Layer w15: P13.2@13130,5660 13130,5599 13143,5586 13579,5586 13580,5587 13612,5587 13728,5587 ; v2@13445,7553 v2(13450,7558) ; SWD2.4@13794,7390.43 v2@13794,7531 ; U6.1@13800,5720 13836,5720 13851,5705 13851,5663 13833,5645 U6.3@13800,5645 13732.56,5645 C46.2@13727.5,5639.94 13727.5,5587.5 13728,5587 ; BLE1.4@14116,5559.57 14046.43,5559.57 14019,5587 13728,5587 ; PI2.4@14174,7025.43 SWD1.4@14174,7390.43 v2@14174,7524 ; PI1.1@14360,7540 14367,7533 14414,7533 14427,7520 14427,7441 14428,7441 14448,7421 14495,7421 14555,7481 14776,7481 14804,7453 GPS1.6@14804,7390.43 14804,7318 14815,7307 15574,7307 ; C31.2@14647.5,6039.94 v1@14647.5,6115.5 ; 14800,5661 R44.1@14800,5728.5 ; 15194,7311 FLOW1.4@15194,7390.43 ; v1(15461,5690) 15483.82,5667.18 15483.82,5628.82 ; *U1.2@15565,5905.59 15708.15,5905.59 15710,5907.44 D1.2@15725,5922.44 15730.44,5917 D1.2@15740,5917 ; *U1.3@15565,5931.18 15716.26,5931.18 15690.44,5957 *U1.4@15565,5957 ; SONAR1.4@15574,7390.43 15574,7307 ; R15.1@15685,6208.5 R14.1@15765,6208.5 ; v2(15772,7307) 15574,7307 ; v2@15788,5913.38 15788,5922.44 15788,6185.5 R14.1@15765,6208.5 ; R13.1@15829,6208.5 R14.1@15765,6208.5
  Top Layer w20: BLE1.4@14116,5559.57 14116,5627 14148,5659 14506,5659 ; CAN1.4@14506,5559.57 14506,5659 ; IMU_BACK1.4@14896,5559.57 14896,5658 14895,5659 ; POWER1.2@15483.82,5559.57 15483.82,5628.82 ; POWER1.1@15533.03,5559.57 15533.03,5603.03 15590,5660 15690,5660 15740,5710 15740,5917 D1.2@15740,5922.44 ; D1.2@15710,5907.44 15710,5750 15660,5700 15555,5700 15483.82,5628.82 ; 14506,5659 14895,5659 ; 14895,5659 15453.64,5659 15483.82,5628.82
  Top Layer w40: R38.1@13445,7495 v2@13445,7553 ; D1.2@15725,5922.44 15740,5922.44 v2@15788,5922.44
  Bottom Layer w15: v2@13450,7549 v2(13450,7558) ; U4.3@14645,6042.36 v1@14645,6113 ; v1(14648,6116) 14986,6116 15047,6055 15047,5769 15126,5690 v1(15461,5690)
  Bottom Layer w40: v2(13450,7558) 13476,7532 v2(13793,7532) 14352,7532 PI1.1@14360,7540 15539,7540 v2(15772,7307) 15783,7296 v2(15783,5922) v2@15788,5927
  other v2: 14171,7527
5V_OUT: pad.0@13200,5440 R39.1 | length 2821.4
  Top Layer w40: 12950,7485 12960,7495 R39.1@13045,7495 ; 13027,5380 13140,5380 pad.0@13200,5440 ; 13045,7570 R39.1@13045,7495 ; 13060,5440 pad.0@13200,5440 ; R39.1@13045,7495 13045,7473 12913,7341 12913,5589 13000,5502 13138,5502 pad.0@13200,5440
BAT: R19.1 U1.23 | length 1821.4
  Top Layer w10: v1(13990.47,6137.53) U1.23@13990.47,6239.53
  Mid-Layer 2 w10: v1(13990.47,6137.53) 13990.47,5780.53 14051,5720 v1(14051,5700)
  Bottom Layer w10: v1(14051,5700) 14184,5700 14306,5578 14473.5,5578 14631,5420.5 R19.1@15192,5420.5
BEEP: POWER1.3 U1.55 | length 2053.6
  Top Layer w10: U1.55@14049.53,6680.47 14049.53,6507.47 v1(14074,6483) ; v1(15433,5558) POWER1.3@15434.61,5559.57
  Mid-Layer 2 w10: v1(14074,6483) 14075,6484 14075,6377 14409,6043 15013,6043 15433,5623 v1(15433,5558)
CANH: CAN1.2 R29.2 U4.7 | length 278.2
  Top Layer w10: v1(14603,5615) 14604.61,5613.39 CAN1.2@14604.61,5559.57
  Bottom Layer w10: R29.2@14588.5,5740 14588.5,5629.5 v1(14603,5615) ; R29.2@14595,5746.5 U4.7@14595,5837.64
CANL: CAN1.1 R29.1 U4.6 | length 283.3
  Top Layer w10: v1(14653,5616) 14653.82,5615.18 CAN1.1@14653.82,5559.57
  Bottom Layer w10: U4.6@14645,5837.64 14645,5746.5 R29.1@14651.5,5740 14651.5,5616.5 14651,5616 v1(14653,5616)
CANRX: U2.44 U4.4 | length 921.1
  Top Layer w10: v1(14551,6403) 14551,6450 14574,6473 14584,6483 14853,6483 14878,6458 14878,6414 14900.9,6391.1 U2.44@14959.53,6391.1
  Mid-Layer 1 w10: v1(14551,6403) 14551,6313 14696,6168 v1(14696,6075)
CANTX: U2.45 U4.1 | length 952.2
  Top Layer w10: U2.45@14959.53,6371.42 15050.58,6371.42 15068,6354 15112,6354 15119,6347 v1(15120,6347)
  Mid-Layer 1 w10: v1(14546,6077) 14586,6037 14724,6037 14927.31,6240.31 14927.31,6280.31 14999,6352 15071,6352 15115,6352 v1(15120,6347)
  Bottom Layer w10: U4.1@14545,6042.36 14545,6076 v1(14546,6077)
CS1: IS1.5 U1.24 | length 805.7
  Top Layer w10: v1(13993,6337) 14010.16,6319.84 U1.24@14010.16,6239.53 ; IS1.5@14504.06,6314.37 v1@14504.06,6350.06
  Bottom Layer w10: v1(13993,6337) 13993,6392 14050,6449 14455,6449 14506,6398 v1(14506,6351) v1@14510,6355
CS1_IMU: LIS1.10 U2.61 | length 874.4
  Top Layer w10: LIS1.10@14769.53,6610.47 14769.53,6596.47 14778,6588 v1(14823,6588) ; U2.61@15268.58,6239.53 15268.58,6345.42
  Bottom Layer w10: v1(14823,6588) 14788,6623 14788,6665 14796,6673 14871,6673 14941,6673 v1(15259,6355)
CS2: MS1.4 MS1.5 U1.25 | length 1032.9
  Top Layer w10: U1.25@14029.84,6239.53 14029.84,6326.84 v1(14039,6336) ; v1(14608,6412) 14609.82,6413.82 MS1.5@14670.79,6413.82 MS1.4@14769.21,6413.82
  Bottom Layer w10: v1(14039,6336) 14039,6400 14066,6427 14423,6427 14471,6379 14471,6325 14479,6317 14530,6317 14608,6395 v1(14608,6412)
CS2_IMU: LSM1.5 U2.62 | length 1248.7
  Top Layer w10: LSM1.5@14499.06,6679.37 14499.06,6740.06 v1(14501,6742) ; v1(15265,6419) 15288.27,6395.73 U2.62@15288.27,6239.53
  Mid-Layer 1 w10: v1(14501,6742) 14501,6574 14609,6466 15203,6466 15218,6466 v1(15265,6419)
CS3: NRF1.3 U1.8 | length 1900.7
  Top Layer w10: U1.8@13799.53,6469.84 13979.84,6469.84 v1(13980,6470)
  Mid-Layer 1 w10: v1(13980,6470) 13980,6504 14585,7109 15125,7109 15130,7109 15187,7052 v1(15187,6940)
  Bottom Layer w10: NRF1.3@15094,6940 v1(15187,6940)
CS3_IMU: U2.8
CS4: R42.2 U1.9 U5.1 | length 636.6
  Top Layer w10: v1(13731,6439) 13729,6441 13738.16,6450.16 U1.9@13799.53,6450.16 ; v1(13742,6703) 13805,6703 v1(13822,6720)
  Bottom Layer w10: v1(13731,6439) 13742,6450 v1(13742,6703) ; v1(13822,6720) 13842,6700 R42.2@13908.5,6700 13908.5,6795.23 U5.1@13918.27,6805
FLASH_CS: R9.2 U2.33 U3.1 | length 543
  Top Layer w10: U2.33@14959.53,6607.64 14959.53,6655.47 14842,6773 14842,6898 14864,6920 U3.1@14936.73,6920 14970,6920 14986.5,6903.5 R9.2@15030,6903.5